# Altium PCB BRELOK_DWS 1.0.PcbDoc
Units mm, origin at the board's own origin, x right, y up, seen from the top; angles counter-clockwise.
Board outline 39.99 x 51.83 mm, 2 copper layers (Top Layer, Bottom Layer); 17 components, 21 nets, 80 pads, 29 vias.
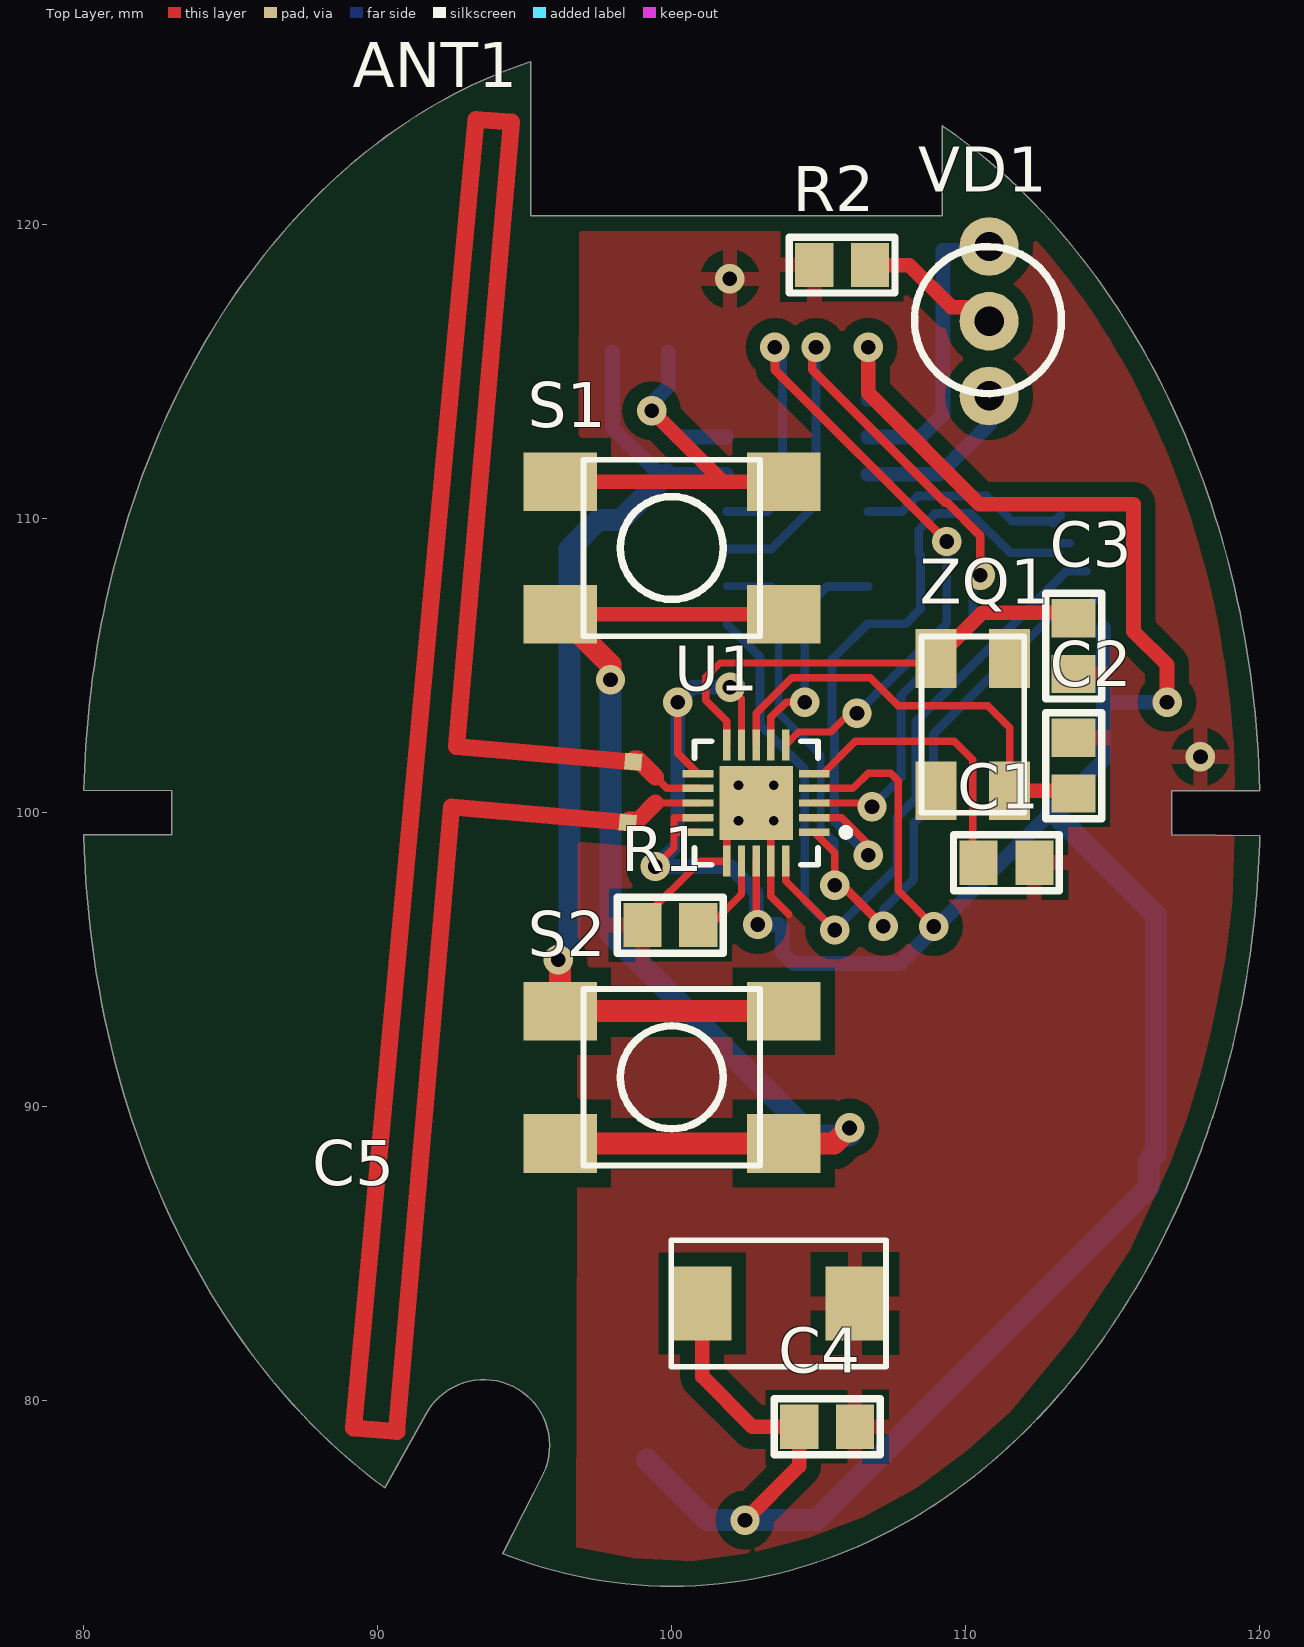
[diagram p0: Top Layer view]
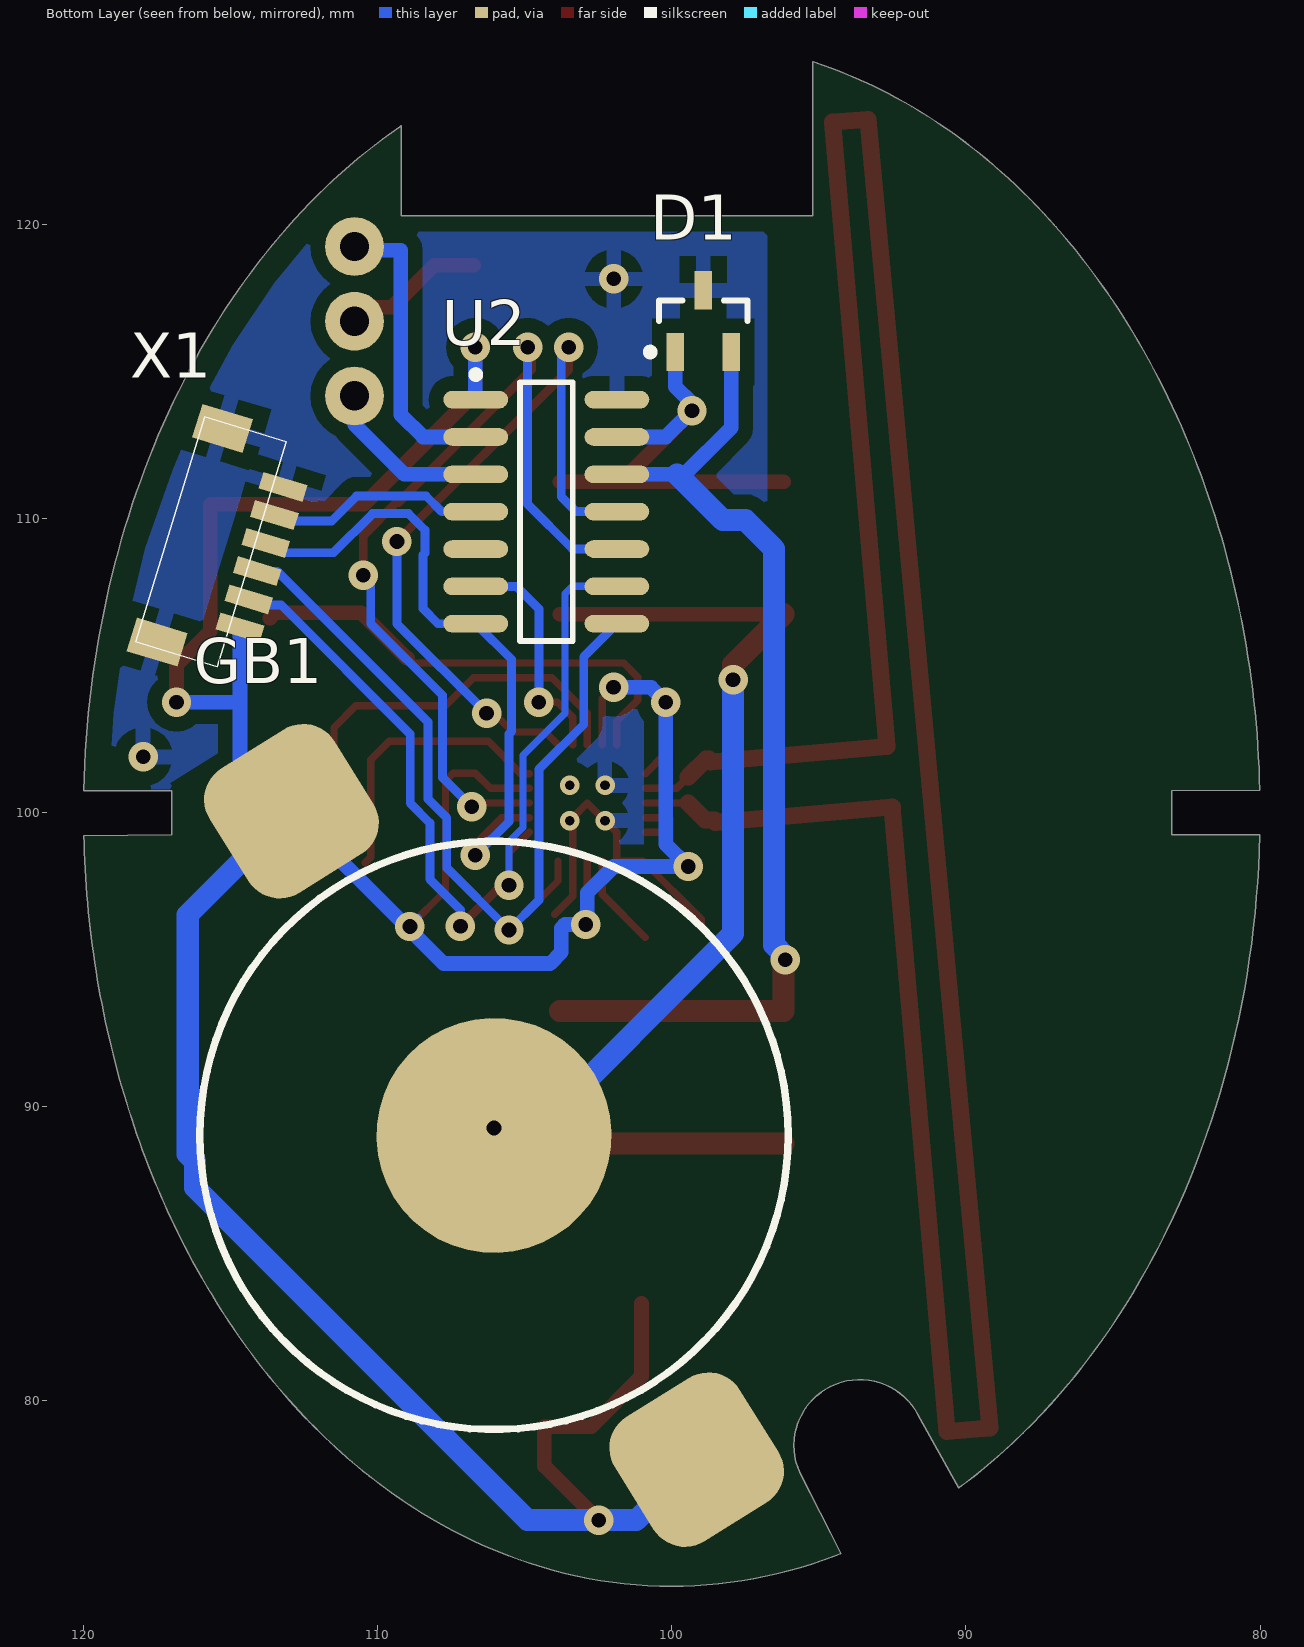
[diagram p1: Bottom Layer view, seen from below]

## Layer stack, top to bottom
Top Layer: signal copper 0.0356
Dielectric: dielectric 0.32, FR-4, Dk 4.8
Bottom Layer: signal copper 0.0356

## Board outline
366 vertices, not listed, extent 80.008,73.7 119.993,125.531

## Design rules (kind name [scope] priority, off if disabled: settings)
Clearance "Clearance_GND_VCC +3.3" [InNet('GND') vs InNet('VCC +3.3')] p1 off: gap=0.2
Clearance Clearance_U3_Trace [(IsTrack  And IsNet)  And InRegion(3815,3770 ,4275 ,4280) vs (IsTrack  And IsNet)  And InRegion(3815,3770 ,4275 ,4280)] p2: gap=0.2
Clearance Clearance_QFP_NET [InNet('SPI_MISO/DO','SPI_MOSI/DI','GND','VCC','GDO2','GDO0','SPI_SS','SPI_SCK','NetC3_1','NetC2_1','GND','NetC1_2','NetANT1_1','NetR1_2')  And InRegion(3815,3770 ,4275 ,4280) vs InNet('SPI_MISO','SPI_MOSI','GND','VCC','GDO2','GDO0','SPI_SS','SPI_SCK','NetC3_1','NetC2_1','GND')  And InRegion(3815,3770 ,4275 ,4280)] p3: gap=0.2
Clearance Clearance_QFP_Pins [InComponent('U1') And IsPad] p4: gap=0.2
Clearance Clearance_GND [InPolygon] p5: gap=0.5
Clearance [All] p6: gap=0.3
ComponentClearance ComponentClearance_R1_C10 [InComponent('C10') vs InComponent('R1')] p1 off: gap=0 collisioncheckmode=3 verticalgap=0 showdistances=FALSE
ComponentClearance [All] p2 off: gap=0.3 collisioncheckmode=3 verticalgap=0.3 showdistances=FALSE
HoleSize [All] p1: absolutevalues=TRUE maxlimit=5 minlimit=0.3 maxpercent=80.000 minpercent=20.000
NetAntennae [All] p1: netantennaetolerance=50
PlaneConnect [All] p1: planeconnectstyle=Relief reliefexpansion=0.508 reliefentries=4 reliefconductorwidth=0.3 reliefairgap=0.3
PolygonConnect [All] p1: connectstyle=Relief reliefconductorwidth=0.5 reliefentries=4 polygonreliefangle="90 Angle"
RoutingCorners [All] p1: cornerstyle=45-Degree minsetback=2.54 maxsetback=5
RoutingVias [All] p1: holewidth=0.5 width=1.6 viastyle="Through Hole" minholewidth=0.3 minwidth=1 maxholewidth=1 maxwidth=2
ShortCircuit ShortCircuit_ANT1 [InComponent('ANT1')] p1: allowed=TRUE
ShortCircuit [All] p2: allowed=FALSE
SilkToSilkClearance [All] p1: silktosilkclearance=0.3
SilkscreenOverComponentPads [All] p1: minsilkscreentomaskgap=0.254
SolderMaskExpansion [All] p1: expansion=0.102
Width [All] p1: maxlimit=5 minlimit=0.2 preferedwidth=0.3
20 further rules are at their usual default settings.

## Components (designator, comment, footprint, x,y, rotation, side; value= is the part's Value field where it differs from the comment)
ANT1 "DIPOL 2.4GHz" ANT_DIPOL_2.4GHZ 98,100.75 r85 top
C1 "KONDENS_SMD" C0805 111.379,98.298 r180 top
C2 "KONDENS_SMD" C0805 113.665,101.6 r90 top
C3 "KONDENS_SMD" C0805 113.665,105.664 r270 top
C4 "KONDENS_SMD" C0805 105.283,79.121 r0 top
C5 "Tantal" SMD_D 103.632,83.312 r90 top
D1 "BAT54A" SOT23_N 98.933,116.713 r90 bottom
GB1 "CR2032" BAT_HOLDER_CR2032 106.045,89.027 r148 bottom
R1 "RES" C0805 99.95,96.175 r0 top
R2 "RES" C0805 105.791,118.618 r0 top
S1 "KAN0642-0501B" KAN0642-0501B 100,109 r180 top
S2 "KAN0642-0501B" KAN0642-0501B 100,91 r180 top
U1 "CC2500" VQFN20 102.87,100.33 r180 top
U2 "ATtiny44A-SSU" 14S1_N 104.267,110.236 r180 bottom
VD1 "LIGHTDIODE2" LIGHTDIODE2 110.75,116.75 r90 top
X1 "SH06V" SH06V 114.681,106.299 r287 bottom
ZQ1 "SMD0603" QUARTZ_SMD0603 110.236,102.997 r270 top

## Footprints (in the part's own frame and the unit in brackets; to place one, negate y for a bottom-side part, rotate by r counter-clockwise, add the part's x,y. Pads: shape width x height; smd on the part's side, far side on the other; paste and mask are expansions set on the pad)
14S1_N [mm] "SOIC, 14-Leads, Body 8.7x3.9mm, Pitch 1.27mm, IPC Medium Density"
  oval 2.2x0.6 smd: 1(-2.4,3.81) 2(-2.4,2.54) 3(-2.4,1.27) 4(-2.4,0) 5(-2.4,-1.27) 6(-2.4,-2.54) 7(-2.4,-3.81) 8(2.4,-3.81) 9(2.4,-2.54) 10(2.4,-1.27) 11(2.4,0) 12(2.4,1.27) 13(2.4,2.54) 14(2.4,3.81)
  silkscreen extent -2.53,-4.4 0.9,4.78, body extent -2,-4.38 2,4.38, height 1.75
ANT_DIPOL_2.4GHZ [mm]
  rect 0.58x0.58 smd: 1(-1.037,-0.6) 2(1.037,-0.6)
  Top Layer lines w0.58: -1.037,-0.6 -1.037,5.425 -22.35,5.425 -22.35,6.9 22.331,6.636 22.35,5.425 1.037,5.425 1.037,-0.6
BAT_HOLDER_CR2032 [mm] "BTH-W39-20"
  rrect50% 5x5 smd: +(0,13) +(0,-13)
  round 8 smd: -(0,0)
  silkscreen extent -10,-10 10,10
C0805 [mm]
  rect 1.3x1.5 smd: 1(-0.95,0) 2(0.95,0)
  silkscreen extent -1.8,-0.95 1.8,0.95
KAN0642-0501B [mm]
  rect 2.5x2 smd: 1(-3.8,2.25) 1(3.8,2.25) 2(-3.8,-2.25) 2(3.8,-2.25)
  silkscreen extent -3,-3 3,3
LIGHTDIODE2 [mm]
  round 2 hole 1: 1(-0.04,-0.04) 2(-2.58,-0.04) 3(2.5,-0.04)
  silkscreen extent -2.5,-2.5 2.5,2.5
QUARTZ_SMD0603 [mm]
  rect 2x1.4 smd: 1(-2.25,-1.25) 2(2.25,-1.25) 3(2.25,1.25) 4(-2.25,1.25)
  silkscreen extent -3,-1.75 3,1.75
SH06V [mm]
  rect 0.6x1.55 smd: 1(0,0) 2(-1,0) 3(-2,0) 4(-3,0) 5(-4,0) 6(-5,0)
  rect 1.2x1.8 smd: 7(-6.3,-2.55) 8(1.3,-2.55)
  silkscreen extent -6.5,-3.25 1.5,-0.35
SMD_D [mm]
  rect 2.5x2 smd: 1(0,2.6) 2(0,-2.6)
  silkscreen extent -2.15,-3.65 2.15,3.65
SOT23_N [mm] "SOT23, 3-Leads, Body 2.9x1.3mm, Pitch 0.95mm, Lead Span 2.3mm, IPC Medium Density"
  rect 1.3x0.6 smd: 1(-1.05,0.95) 2(-1.05,-0.95) 3(1.05,0)
  silkscreen extent -1.17,-1.5 0.7,1.93, body extent -0.7,-1.5 0.7,1.5, height 1.1
VQFN20 [mm] "QFN, 20-Leads, Body 4,2x4,2mm (max), Pitch 0,50mm, IPC Low Density"
  rect 1.05x0.25 smd: 1(-1.975,1) 2(-1.975,0.5) 3(-1.975,0) 4(-1.975,-0.5) 5(-1.975,-1) 11(1.975,-1) 12(1.975,-0.5) 13(1.975,0) 14(1.975,0.5) 15(1.975,1)
  rect 0.25x1.05 smd: 6(-1,-1.975) 7(-0.5,-1.975) 8(0,-1.975) 9(0.5,-1.975) 10(1,-1.975) 16(1,1.975) 17(0.5,1.975) 18(0,1.975) 19(-0.5,1.975) 20(-1,1.975)
  rect 2.5x2.5 smd: 21(0,0)
  silkscreen extent -3.17,-2.1 2.1,2.1, body extent -2.07,-2.07 2.07,2.07, height 0.8

## Part data
ANT1: library part ANT_dipol_2.4GHz
C5: library part Capasitor_POL_Tantal, "SMD_D"
D1: "Schottky Barrier Double Diode"
GB1: library part BAT_Holder_CR2032, "BTH-W39-20"
R1 R2: "Resistor"
U2: "8-bit AVR Microcontroller, 1.8-5.5V, 4KB Flash, 256 Bytes EEPROM, 256 Bytes SRAM, 14-pin SOIC, Industrial Grade (-40°C to 85°C), Pb-Free"
ZQ1: library part Quartz_SMD0603

## Via types
v1: diameter 1, hole 0.5, Top Layer to Bottom Layer, tented both sides, 24 vias
v2: diameter 0.66, hole 0.33, Top Layer to Bottom Layer, tented both sides, 3 vias
v3: diameter 0.66, hole 0.33, Top Layer to Bottom Layer, 1 vias
v4: diameter 1, hole 0.5, Top Layer to Bottom Layer, tented top, 1 vias

## Nets (pads, with @x,y where several pads share a name; then routed paths per layer and width w, separated by ;. In a path a pad name is that pad's centre, name@x,y a point inside that pad or via, vN(x,y) a via of type N, cw(c..) or ccw(c..) an arc to the next point about the centre after c; other vN are vias at no path point)
GDO0: U1.6 U2.11 | length 26.7
  Top Layer w0.25: U1.6 104.308,102.743 105.41,102.743 106.045,103.378 v1(106.299,103.378) v1@106.68,103.378
  Top Layer w0.3: v1(103.505,115.824) 103.505,115.062 v1(109.347,109.22)
  Bottom Layer w0.3: U2.11 103.251,110.236 103.759,110.744 103.759,115.57 v1(103.505,115.824) ; v1(106.299,103.378) 109.347,106.426 v1(109.347,109.22)
GDO2: U1.3 U2.10 | length 30.7
  Top Layer w0.25: U1.3 106.68,100.33 v1(106.807,100.203)
  Top Layer w0.3: v1(104.902,115.824) 104.775,115.824 104.775,115.062 109.286,110.551 109.36,110.551 110.49,109.421 v1(110.49,108.077)
  Bottom Layer w0.3: U2.10 103.378,108.966 104.902,110.49 v1(104.902,115.824) ; v1(106.807,100.203) 107.795,101.191 107.795,103.985 110.236,106.426 110.236,107.823 v1(110.49,108.077)
GND: C1.1 C2.2 C3.2 C4.2 C5.2 D1.3 R1.1 R2.1 U1.16 U1.19 U1.21 U2.14 X1.6 X1.7 X1.8 | length 10.5
  Top Layer w0.25: R1.1 99,96.375 100.98,98.355 U1.16 101.87,99.33 U1.21 103.37,99.83 U1.19 103.37,97.155 103.975,96.55
  other v1: 117.975,101.9 101.975,118.15
  other v2: 103.47,99.73 102.27,100.93 103.47,100.93
  other v3: 102.27,99.73
NetANT1_1: ANT1.1 ANT1.2 U1.12 U1.13 | length 5.2
  Top Layer w0.25: 99.441,100.33 U1.13 ; 99.441,101.219 99.83,100.83 U1.12
  Top Layer w0.58: ANT1.1@98.551,99.753 98.864,99.753 99.441,100.33 ; ANT1.2@98.732,101.819 98.841,101.819 99.441,101.219
NetANT1_2: 
NetC1_2: C1.2 U1.5 | length 9.7
  Top Layer w0.25: U1.5 105.14,101.33 106.235,102.425 109.609,102.425 110.236,101.798 110.236,98.491 C1.2
NetC2_1: C2.1 U1.8 ZQ1.3 | length 15.3
  Top Layer w0.25: U1.8 102.87,103.378 104.076,104.584 106.744,104.584 107.696,103.632 110.744,103.632 111.486,102.89 ZQ1.3
  Top Layer w0.5: ZQ1.3 113.568,100.747 C2.1
NetC3_1: C3.1 U1.10 ZQ1.1 | length 15.8
  Top Layer w0.25: U1.10 101.87,103.108 101.156,103.822 101.156,104.609 101.639,105.092 108.705,105.092 ZQ1.1@108.768,105.029
  Top Layer w0.5: ZQ1.1 109.008,105.247 110.558,106.797 113.482,106.797 C3.1
NetD1_1: D1.1 S1.2 U2.13 | length 18.2
  Top Layer w0.5: S1.2@96.2,111.25 103.8,111.25 103.798,111.252 101.727,111.252 v1(99.314,113.665)
  Bottom Layer w0.3: v1(99.314,113.665) v1@99.314,113.919
  Bottom Layer w0.5: v1(99.314,113.665) 100.203,112.776 U2.13 ; v1@99.314,113.919 99.883,114.488 D1.1
NetD1_2: D1.2 S2.2 U2.12 | length 35.1
  Top Layer w0.75: v1(96.139,95.001) 96.2,95.062 96.2,93.25 S2.2@103.8,93.25
  Bottom Layer w0.3: 99.568,111.506 99.822,111.506
  Bottom Layer w0.5: D1.2 97.983,113.091 99.568,111.506 ; 99.822,111.506 U2.12
  Bottom Layer w0.75: v1(96.139,95.001) 96.139,95.123 96.52,95.504 96.52,108.966 97.504,109.95 98.266,109.95 99.822,111.506
NetGB1_-: GB1.- S1.1 S2.1 | length 40.2
  Top Layer w0.5: S1.1@96.2,106.75 S1.1@103.8,106.75
  Top Layer w0.75: S2.1@96.2,88.75 103.8,88.75 105.514,88.75 v4(106.045,89.281) ; S1.1@96.2,106.75 97.917,105.033 v1(97.917,104.521)
  Bottom Layer w0.75: v1(97.917,104.521) 97.917,95.885 104.775,89.027 GB1.-
NetR1_2: R1.2 U1.17 | length 3.1
  Top Layer w0.25: R1.2@100.899,95.758 102.32,97.179 ; 102.37,97.229 U1.17
NetR2_2: R2.2 VD1.1 | length 4.6
  Top Layer w0.5: R2.2 108.077,118.618 109.514,117.181 VD1.1@110.784,117.181
NetU2_2: U2.2 VD1.3 | length 10.1
  Bottom Layer w0.5: U2.2 108.458,112.776 109.22,113.538 109.22,119.126 110.666,119.126 VD1.3
NetU2_3: U2.3 VD1.2 | length 6.3
  Bottom Layer w0.5: U2.3 109.093,111.506 110.784,113.197 VD1.2@110.784,114.641
RESET: U2.4 X1.5 | length 7.3
  Bottom Layer w0.3: U2.4 107.823,110.236 108.357,110.77 110.718,110.77 111.568,109.92 X1.5@113.03,109.92 ; X1.5@112.965,109.855 X1.5@113.227,110.117
SPI_MISO/DO: U1.20 U2.8 X1.3 | length 31.1
  Top Layer w0.25: U1.20 103.87,97.679 v1(105.537,96.012)
  Bottom Layer w0.3: U2.8 102.997,105.296 102.997,102.997 104.521,101.473 104.521,97.028 v1(105.537,96.012) 107.65,98.125 107.65,99.825 108.295,100.469 108.295,103.088 113.419,108.212 X1.3
SPI_MOSI/DI: U1.2 U2.7 X1.4 | length 22
  Top Layer w0.25: U1.2 105.783,99.83 106.68,98.933 v1(106.68,98.552)
  Bottom Layer w0.3: v1(106.68,98.552) 105.537,99.695 105.537,102.684 105.449,102.772 105.449,105.208 U2.7 107.95,106.426 108.458,106.934 108.458,108.765 108.397,108.826 108.397,109.614 108.953,110.17 110.175,110.17 111.506,108.839 X1.4@113.157,108.839 ; X1.4@113.225,109.161 X1.4@113.52,109.161
SPI_SCK: U1.1 U2.9 X1.2 | length 31.5
  Top Layer w0.25: U1.1 105.537,98.638 v1(105.537,97.536)
  Top Layer w0.3: v1(105.537,97.536) 105.791,97.536 v1(107.188,96.139)
  Bottom Layer w0.25: U2.9 103.378,107.696 103.632,107.442 103.632,103.378 105.062,101.948 105.062,99.498 105.537,99.023 v1(105.537,97.536)
  Bottom Layer w0.3: v1(107.188,96.139) 107.188,96.702 108.225,97.739 108.225,99.65 108.894,100.319 108.894,102.671 113.284,107.061 114.194,107.061 X1.2
SPI_SS: U1.7 U2.6 | length 8.1
  Top Layer w0.25: U1.7 103.37,103.242 103.887,103.759 v1(104.521,103.759)
  Bottom Layer w0.25: v1(104.521,103.759) v1@104.648,103.759
  Bottom Layer w0.3: v1(104.521,103.759) 104.521,106.934 105.283,107.696 U2.6
VCC: C4.1 C5.1 GB1.+ U1.4 U1.9 U1.11 U1.14 U1.15 U1.18 U2.1 X1.1 | length 123.3
  Top Layer w0.25: v1(99.441,98.171) 100.076,98.806 100.076,99.314 ; v1(100.203,103.759) 100.203,102.022 U1.11 ; U1.15 100.092,99.33 100.076,99.314 ; U1.14 100.084,99.83 100.076,99.822 100.076,99.314 ; v1(101.981,104.267) 102.37,103.878 U1.9 ; U1.18 102.87,96.255 v1(102.925,96.2) ; U1.4 106.164,100.83 106.68,101.346 107.442,101.346 107.696,101.092 107.696,97.354 108.905,96.145 v1(108.905,96.13)
  Top Layer w0.5: C5.1 101.032,80.832 102.743,79.121 C4.1 104.333,77.79 v1(102.489,75.946) ; v1(106.68,115.824) 106.68,114.27 110.46,110.49 115.697,110.49 115.697,106.172 116.84,105.029 v1(116.84,103.759)
  Bottom Layer w0.25: v1(101.981,104.267) v1@102.235,104.267 ; v1@108.625,96.425 108.905,96.145 v1(108.905,96.13)
  Bottom Layer w0.5: v1(101.981,104.267) 100.711,104.267 v1(100.203,103.759) 100.203,98.933 v1(99.441,98.171) 101.981,98.171 102.875,97.277 102.875,96.575 103.25,96.2 103.632,96.2 103.759,96.073 103.759,95.25 104.14,94.869 107.751,94.869 112.934,100.052 114.681,101.799 114.681,103.759 ; U2.1 106.68,114.059 v1(106.68,115.824) ; X1.1 114.681,103.759 ; v1(116.84,103.759) 114.681,103.759
  Bottom Layer w0.75: GB1.+@99.156,78.002 101.212,75.946 v1(102.489,75.946) 104.902,75.946 116.205,87.249 116.205,88.138 116.459,88.392 116.459,96.527 GB1.+@112.934,100.052
pads on no net: U2.5 ZQ1.2 ZQ1.4

## Polygon pours and split planes (outlines as drawn)
GND on Top Layer "TOP" (solid, remove dead copper, pour order 2): 96.85,119.725 96.9,119.775 112.125,119.775 112.125,119.75 112.4,119.45 112.7,119.125 112.925,118.85 113.125,118.6 113.35,118.325 113.6,118 113.725,117.825 113.825,117.675 114,117.45 114.175,117.2 114.325,116.975 114.475,116.75 114.625,116.5 114.75,116.3 114.9,116.075 115.025,115.85 115.075,115.775 115.15,115.625 115.3,115.4 115.6,114.85 115.75,114.575 115.875,114.325 115.975,114.1 116.1,113.85 116.225,113.6 116.35,113.35 116.475,113.075 116.6,112.75 116.775,112.4 116.925,112.025 117.075,111.65 117.15,111.425 117.225,111.25 117.375,110.8 117.525,110.375 117.65,110.025 117.75,109.65 117.9,109.175 118.025,108.725 118.15,108.275 118.275,107.8 118.375,107.35 118.45,107.05 118.475,106.875 118.55,106.575 118.625,106.125 118.65,106 118.7,105.625 118.725,105.5 118.8,105.075 118.825,104.95 118.9,104.35 118.925,104.175 119,103.55 119,103.5 119.075,102.6 119.1,102.4 119.15,100.75 117,100.75 117,99.25 119.175,99.25 119.125,99.2 119.05,96.95 118.925,95.825 118.8,94.925 118.5,93.375 118.35,92.625 118,91.225 117.525,89.65 116.95,88.1 115.575,85.125 113.675,82.25 111.525,79.65 110.025,78.3 108.325,77.05 106.5,76.05 104.6,75.325 102.65,74.825 100.675,74.55 98.725,74.65 96.75,75.025
GND on Bottom Layer "BOT" (solid, remove dead copper, pour order 4): 96.883,119.75 96.75,119.625 96.75,80.61 96.725,75.025 98.225,74.7 99.8,74.6 101.225,74.675 102.725,74.875 105.625,75.725 108.4,77.2 111.2,79.4 113.35,81.825 115.1,84.45 116.575,87.25 117.65,90.1 118.425,93.025 118.925,96.05 119.125,99.175 116.975,99.175 116.975,100.8 119.125,100.8 118.975,103.375 118.55,106.275 117.9,109 116.975,111.65 116.025,113.875 114.925,115.9 113.525,118 112.075,119.75

## Silkscreen, mask and mechanical layers (free items; w line width, h text height)
Mechanical 1:
  drawing of 355 lines, arcs and shapes, not listed